# Altium PCB SphinxEVK_ExtIO.PcbDoc
Units mm, origin at the board's own origin, x right, y up, seen from the top; angles counter-clockwise.
Board outline 68.58 x 24 mm, 2 copper layers (Top Layer, Bottom Layer); 8 components, 49 nets, 416 pads, 0 vias.
Unrouted connection lines stored in the file: 145.
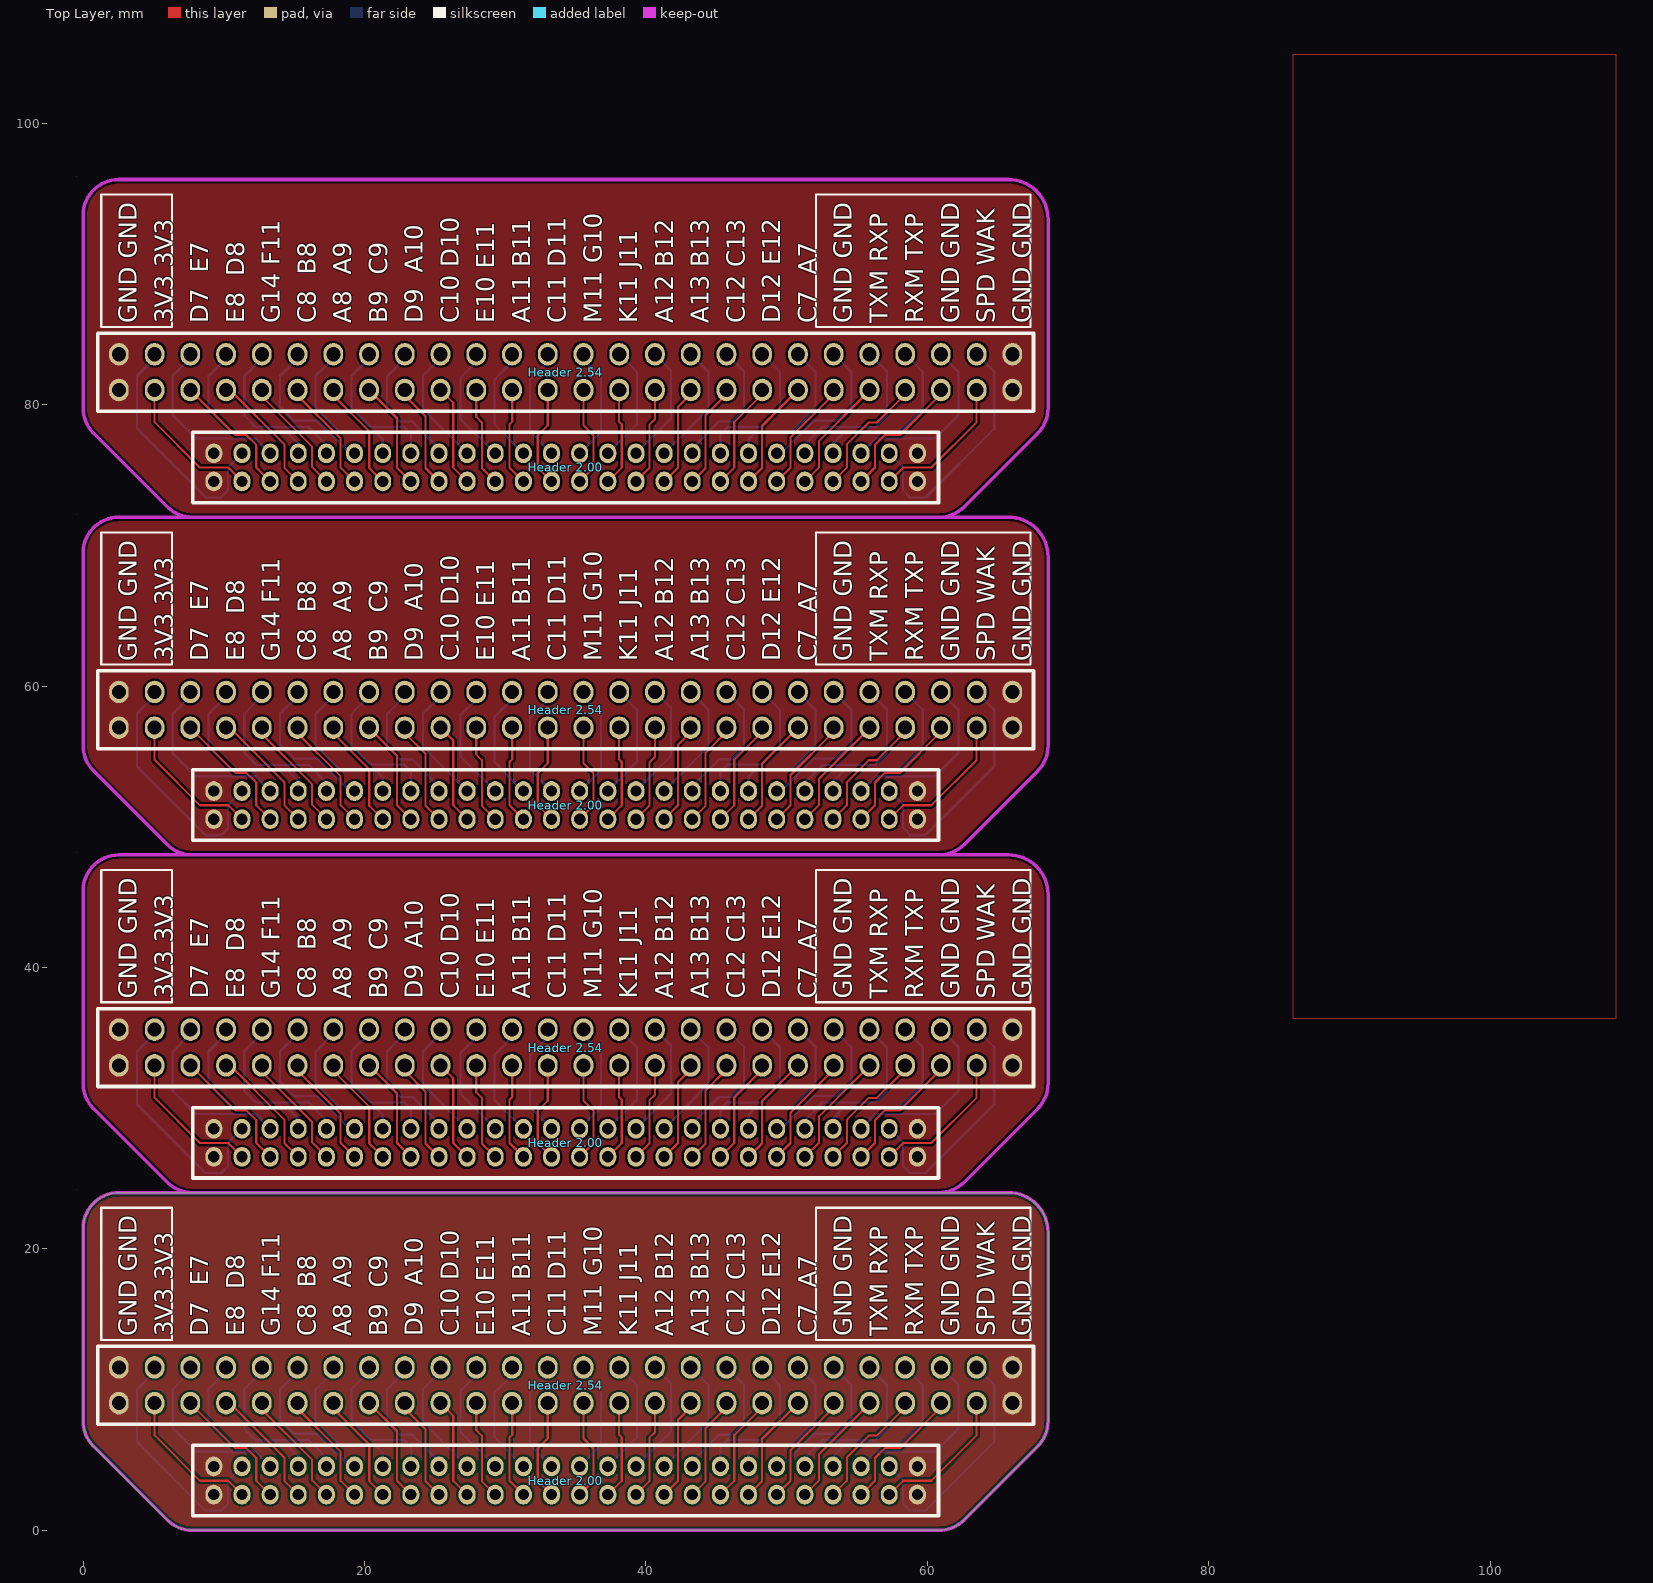
[diagram p0: Top Layer view]
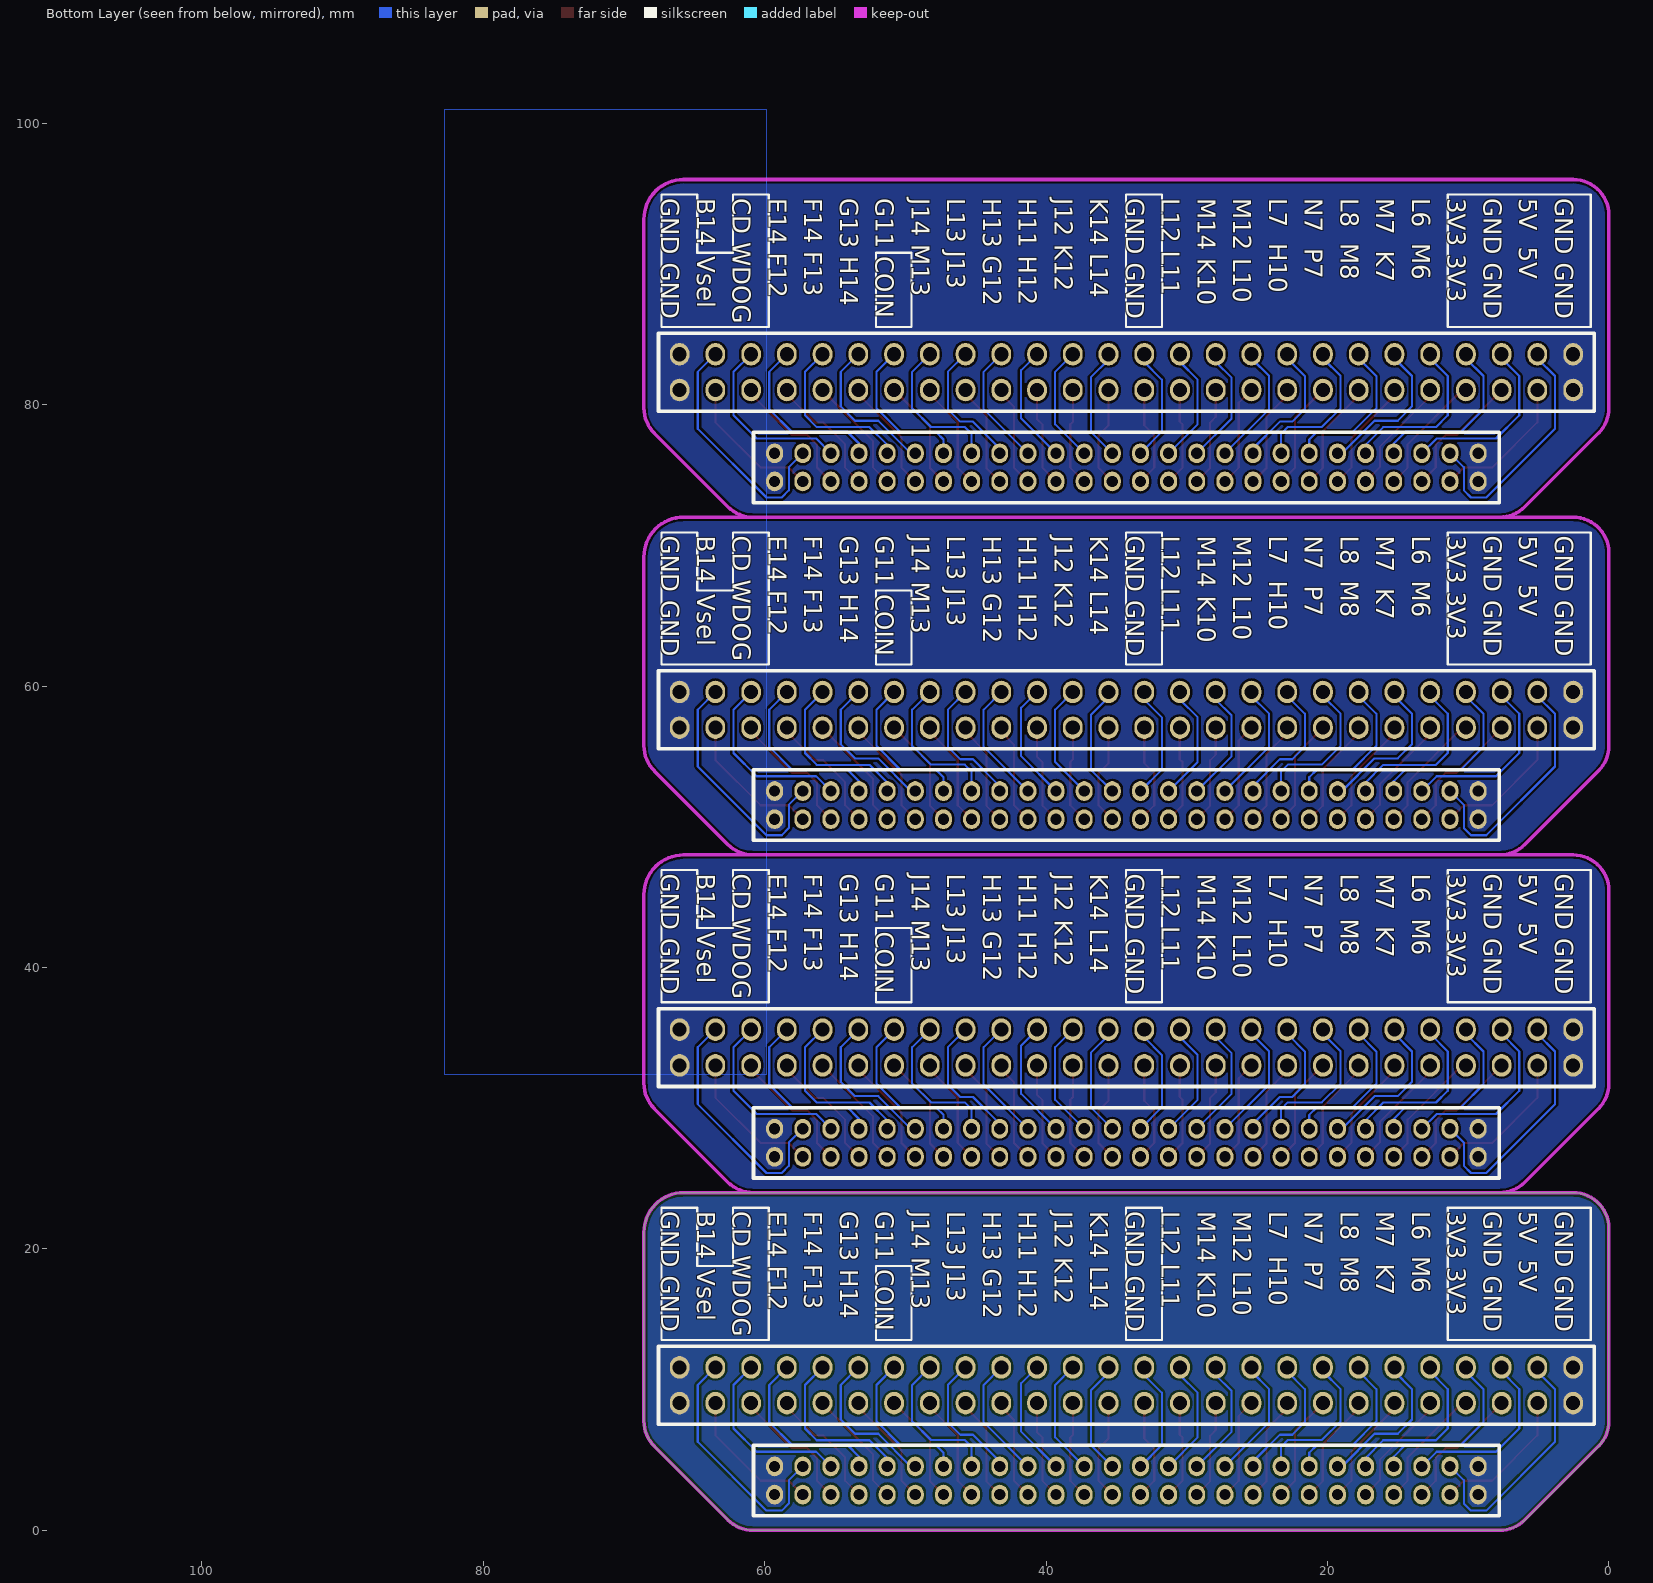
[diagram p1: Bottom Layer view, seen from below]

## Layer stack, top to bottom
Top Solder: solder mask 0.0102, Solder Resist, Dk 3.5
Top Layer: signal copper 0.0356
Dielectric 1: dielectric 0.32, FR-4, Dk 4.8
Bottom Layer: signal copper 0.0356
Bottom Solder: solder mask 0.0102, Solder Resist, Dk 3.5

## Board outline
0.745,5.971 cw(c2.541,7.767) 0.001,7.767 0,7.767 0,21.46 cw(c2.54,21.46) 2.54,24 65.763,24 cw(c65.763,21.183) 68.58,21.183 68.58,7.767 68.579,7.767 cw(c66.039,7.767) 67.835,5.971 62.61,0.745 62.61,0.744 cw(c60.814,2.54) 60.814,0 7.766,0 7.766,0.002 cw(c7.766,2.542) 5.97,0.745

## Design rules (kind name [scope] priority, off if disabled: settings)
Clearance [All] p1: gap=0.152 ignorepadtopadclearanceinfootprint=FALSE
ComponentClearance [All] p1: gap=0 collisioncheckmode=3 verticalgap=0 showdistances=FALSE
PolygonConnect [All] p1: connectstyle=Direct reliefconductorwidth=0.254 reliefentries=4 polygonreliefangle="90 Angle" airgapwidth=0.254
RoutingVias [All] p1: holewidth=0.711 width=1.27 viastyle="Through Hole" minholewidth=0.711 minwidth=1.27 maxholewidth=0.711 maxwidth=1.27
SilkToSilkClearance [All] p1: silktosilkclearance=0.152
SolderMaskExpansion [All] p1: expansion=0.102
Width [All] p1: maxlimit=0.508 minlimit=0.127 preferedwidth=0.152
28 further rules are at their usual default settings.

## Classes and differential pairs
component class SphinxEVK_ExtIO: "Header 2.00" "Header 2.54"

## Components (designator, comment, footprint, x,y, rotation, side; value= is the part's Value field where it differs from the comment)
"Header 2.00" "Header 26X2" "Header 26X2 2mm" 34.292,75.564 r0 top locked
"Header 2.00" "Header 26X2" "Header 26X2 2mm" 34.292,51.564 r0 top locked
"Header 2.00" "Header 26X2" "Header 26X2 2mm" 34.292,27.564 r0 top locked
"Header 2.00" "Header 26X2" "Header 26X2 2mm" 34.292,3.564 r0 top locked
"Header 2.54" "Header 26X2" "Header 26X2 2.54mm" 34.291,82.292 r0 top
"Header 2.54" "Header 26X2" "Header 26X2 2.54mm" 34.291,58.292 r0 top
"Header 2.54" "Header 26X2" "Header 26X2 2.54mm" 34.291,34.292 r0 top
"Header 2.54" "Header 26X2" "Header 26X2 2.54mm" 34.291,10.292 r0 top

## Footprints (in the part's own frame and the unit in brackets; to place one, negate y for a bottom-side part, rotate by r counter-clockwise, add the part's x,y. Pads: shape width x height; smd on the part's side, far side on the other; paste and mask are expansions set on the pad)
"Header 26X2 2.54mm" [mm]
  oval 1.4x1.6 hole 1: 1(-31.751,-1.25) 2(-31.751,1.29) 3(-29.211,-1.25) 4(-29.211,1.29) 5(-26.671,-1.25) 6(-26.671,1.29) 7(-24.131,-1.25) 8(-24.131,1.29) 9(-21.591,-1.25) 10(-21.591,1.29) 11(-19.051,-1.25) 12(-19.051,1.29) 13(-16.511,-1.25) 14(-16.511,1.29) 15(-13.971,-1.25) 16(-13.971,1.29) 17(-11.431,-1.25) 18(-11.431,1.29) 19(-8.891,-1.25) 20(-8.891,1.29) 21(-6.351,-1.25) 22(-6.351,1.29) 23(-3.811,-1.25) 24(-3.811,1.29) 25(-1.271,-1.25) 26(-1.271,1.29) 27(1.269,-1.25) 28(1.269,1.29) 29(3.809,-1.25) 30(3.809,1.29) 31(6.349,-1.25) 32(6.349,1.29) 33(8.889,-1.25) 34(8.889,1.29) 35(11.429,-1.25) 36(11.429,1.29) 37(13.969,-1.25) 38(13.969,1.29) 39(16.509,-1.25) 40(16.509,1.29) 41(19.049,-1.25) 42(19.049,1.29) 43(21.589,-1.25) 44(21.589,1.29) 45(24.129,-1.25) 46(24.129,1.29) 47(26.669,-1.25) 48(26.669,1.29) 49(29.209,-1.25) 50(29.209,1.29) 51(31.749,-1.25) 52(31.749,1.29)
  silkscreen extent -33.25,-2.75 33.25,2.79, body extent -32.97,-2.54 32.98,2.54, height 8
"Header 26X2 2mm" [mm]
  oval 1.2x1.4 hole 0.8: 1(-25.002,-1.023) 2(-25.002,0.977) 3(-23.002,-1.023) 4(-23.002,0.977) 5(-21.002,-1.023) 6(-21.002,0.977) 7(-19.002,-1.023) 8(-19.002,0.977) 9(-17.002,-1.023) 10(-17.002,0.977) 11(-15.002,-1.023) 12(-15.002,0.977) 13(-13.002,-1.023) 14(-13.002,0.977) 15(-11.002,-1.023) 16(-11.002,0.977) 17(-9.002,-1.023) 18(-9.002,0.977) 19(-7.002,-1.023) 20(-7.002,0.977) 21(-5.002,-1.023) 22(-5.002,0.977) 23(-3.002,-1.023) 24(-3.002,0.977) 25(-1.002,-1.023) 26(-1.002,0.977) 27(0.998,-1.023) 28(0.998,0.977) 29(2.998,-1.023) 30(2.998,0.977) 31(4.998,-1.023) 32(4.998,0.977) 33(6.998,-1.023) 34(6.998,0.977) 35(8.998,-1.023) 36(8.998,0.977) 37(10.998,-1.023) 38(10.998,0.977) 39(12.998,-1.023) 40(12.998,0.977) 41(14.998,-1.023) 42(14.998,0.977) 43(16.998,-1.023) 44(16.998,0.977) 45(18.998,-1.023) 46(18.998,0.977) 47(20.998,-1.023) 48(20.998,0.977) 49(22.998,-1.023) 50(22.998,0.977) 51(24.998,-1.023) 52(24.998,0.977)
  silkscreen extent -26.5,-2.52 26.5,2.48, body extent -26.01,-2.17 25.99,4.3, height 6.35

## Nets (pads, with @x,y where several pads share a name; then routed paths per layer and width w, separated by ;. In a path a pad name is that pad's centre, name@x,y a point inside that pad or via, vN(x,y) a via of type N, cw(c..) or ccw(c..) an arc to the next point about the centre after c; other vN are vias at no path point)
A3: "Header 2.00.3" "Header 2.54.3" | length 41
  Top Layer w0.152: 5.08,9.042 5.08,6.749 8.3,3.529 10.303,3.529 11.29,2.542 ; 5.08,33.042 5.08,30.749 8.3,27.529 10.303,27.529 11.29,26.542 ; 5.08,57.042 5.08,54.749 8.3,51.529 10.303,51.529 11.29,50.542 ; 5.08,81.042 5.08,78.749 8.3,75.529 10.303,75.529 11.29,74.542
A4: "Header 2.00.4" "Header 2.54.4" | length 70.3
  Bottom Layer w0.152: 5.08,11.582 5.08,11.286 3.826,10.032 3.826,6.288 8.715,1.399 9.795,1.399 10.306,1.91 10.306,3.558 11.29,4.542 ; 5.08,35.582 5.08,35.286 3.826,34.032 3.826,30.288 8.715,25.399 9.795,25.399 10.306,25.91 10.306,27.558 11.29,28.542 ; 5.08,59.582 5.08,59.286 3.826,58.032 3.826,54.288 8.715,49.399 9.795,49.399 10.306,49.91 10.306,51.558 11.29,52.542 ; 5.08,83.582 5.08,83.286 3.826,82.032 3.826,78.288 8.715,73.399 9.795,73.399 10.306,73.91 10.306,75.558 11.29,76.542
A5: "Header 2.00.5" "Header 2.54.5" | length 37.2
  Top Layer w0.152: 7.62,9.042 10.818,5.844 11.604,5.844 12.303,5.145 12.303,3.529 13.29,2.542 ; 7.62,33.042 10.818,29.844 11.604,29.844 12.303,29.145 12.303,27.529 13.29,26.542 ; 7.62,57.042 10.818,53.844 11.604,53.844 12.303,53.145 12.303,51.529 13.29,50.542 ; 7.62,81.042 10.818,77.844 11.604,77.844 12.303,77.145 12.303,75.529 13.29,74.542
A6: "Header 2.00.6" "Header 2.54.6" | length 51.6
  Bottom Layer w0.152: 7.62,11.582 7.62,11.286 6.366,10.032 6.366,7.241 8.017,5.59 12.242,5.59 13.29,4.542 ; 7.62,35.582 7.62,35.286 6.366,34.032 6.366,31.241 8.017,29.59 12.242,29.59 13.29,28.542 ; 7.62,59.582 7.62,59.286 6.366,58.032 6.366,55.241 8.017,53.59 12.242,53.59 13.29,52.542 ; 7.62,83.582 7.62,83.286 6.366,82.032 6.366,79.241 8.017,77.59 12.242,77.59 13.29,76.542
A7: "Header 2.00.7" "Header 2.54.7" | length 35.2
  Top Layer w0.152: 10.16,9.042 10.438,9.042 14.303,5.177 14.303,3.528 15.29,2.542 ; 10.16,33.042 10.438,33.042 14.303,29.177 14.303,27.528 15.29,26.542 ; 10.16,57.042 10.438,57.042 14.303,53.177 14.303,51.528 15.29,50.542 ; 10.16,81.042 10.438,81.042 14.303,77.177 14.303,75.528 15.29,74.542
A8: "Header 2.00.8" "Header 2.54.8" | length 50
  Bottom Layer w0.152: 10.16,11.582 10.16,11.286 8.906,10.032 8.906,7.685 10.493,6.098 14.43,6.098 15.29,5.238 15.29,4.542 ; 10.16,35.582 10.16,35.286 8.906,34.032 8.906,31.685 10.493,30.098 14.43,30.098 15.29,29.238 15.29,28.542 ; 10.16,59.582 10.16,59.286 8.906,58.032 8.906,55.685 10.493,54.098 14.43,54.098 15.29,53.238 15.29,52.542 ; 10.16,83.582 10.16,83.286 8.906,82.032 8.906,79.685 10.493,78.098 14.43,78.098 15.29,77.238 15.29,76.542
A9: "Header 2.00.9" "Header 2.54.9" | length 33.6
  Top Layer w0.152: 12.7,9.042 12.7,8.59 16.272,5.018 16.272,3.56 17.29,2.542 ; 12.7,33.042 12.7,32.59 16.272,29.018 16.272,27.56 17.29,26.542 ; 12.7,57.042 12.7,56.59 16.272,53.018 16.272,51.56 17.29,50.542 ; 12.7,81.042 12.7,80.59 16.272,77.018 16.272,75.56 17.29,74.542
A10: "Header 2.00.10" "Header 2.54.10" | length 48.7
  Bottom Layer w0.152: 12.7,11.582 12.7,11.286 11.446,10.032 11.446,7.241 12.284,6.402 16.031,6.402 17.29,5.143 17.29,4.542 ; 12.7,35.582 12.7,35.286 11.446,34.032 11.446,31.241 12.284,30.402 16.031,30.402 17.29,29.143 17.29,28.542 ; 12.7,59.582 12.7,59.286 11.446,58.032 11.446,55.241 12.284,54.402 16.031,54.402 17.29,53.143 17.29,52.542 ; 12.7,83.582 12.7,83.286 11.446,82.032 11.446,79.241 12.284,78.402 16.031,78.402 17.29,77.143 17.29,76.542
A11: "Header 2.00.11" "Header 2.54.11" | length 32.7
  Top Layer w0.152: 15.24,9.042 15.24,8.654 18.304,5.59 18.304,3.528 19.29,2.542 ; 15.24,33.042 15.24,32.654 18.304,29.59 18.304,27.528 19.29,26.542 ; 15.24,57.042 15.24,56.654 18.304,53.59 18.304,51.528 19.29,50.542 ; 15.24,81.042 15.24,80.654 18.304,77.59 18.304,75.528 19.29,74.542
A12: "Header 2.00.12" "Header 2.54.12" | length 43.6
  Bottom Layer w0.152: 15.24,11.582 15.24,11.286 13.986,10.032 13.986,7.876 15.002,6.86 16.653,6.86 18.971,4.542 19.29,4.542 ; 15.24,35.582 15.24,35.286 13.986,34.032 13.986,31.876 15.002,30.86 16.653,30.86 18.971,28.542 19.29,28.542 ; 15.24,59.582 15.24,59.286 13.986,58.032 13.986,55.876 15.002,54.86 16.653,54.86 18.971,52.542 19.29,52.542 ; 15.24,83.582 15.24,83.286 13.986,82.032 13.986,79.876 15.002,78.86 16.653,78.86 18.971,76.542 19.29,76.542
A13: "Header 2.00.13" "Header 2.54.13" | length 31.8
  Top Layer w0.152: 17.78,9.042 17.78,8.657 20.336,6.101 20.336,3.496 21.29,2.542 ; 17.78,33.042 17.78,32.657 20.336,30.101 20.336,27.496 21.29,26.542 ; 17.78,57.042 17.78,56.657 20.336,54.101 20.336,51.496 21.29,50.542 ; 17.78,81.042 17.78,80.657 20.336,78.101 20.336,75.496 21.29,74.542
A14: "Header 2.00.14" "Header 2.54.14" | length 44.1
  Bottom Layer w0.152: 17.78,11.582 17.78,11.286 16.526,10.032 16.526,7.749 18.24,6.034 20.78,6.034 21.29,5.525 21.29,4.542 ; 17.78,35.582 17.78,35.286 16.526,34.032 16.526,31.749 18.24,30.034 20.78,30.034 21.29,29.525 21.29,28.542 ; 17.78,59.582 17.78,59.286 16.526,58.032 16.526,55.749 18.24,54.034 20.78,54.034 21.29,53.525 21.29,52.542 ; 17.78,83.582 17.78,83.286 16.526,82.032 16.526,79.749 18.24,78.034 20.78,78.034 21.29,77.525 21.29,76.542
A15: "Header 2.00.15" "Header 2.54.15" | length 30.9
  Top Layer w0.152: 20.32,9.042 22.304,7.057 22.304,3.527 23.29,2.542 ; 20.32,33.042 22.304,31.057 22.304,27.527 23.29,26.542 ; 20.32,57.042 22.304,55.057 22.304,51.527 23.29,50.542 ; 20.32,81.042 22.304,79.057 22.304,75.527 23.29,74.542
A16: "Header 2.00.16" "Header 2.54.16" | length 42.9
  Bottom Layer w0.152: 20.32,11.582 20.32,11.286 19.066,10.032 19.066,7.749 20.399,6.415 22.812,6.415 23.29,5.938 23.29,4.542 ; 20.32,35.582 20.32,35.286 19.066,34.032 19.066,31.749 20.399,30.415 22.812,30.415 23.29,29.938 23.29,28.542 ; 20.32,59.582 20.32,59.286 19.066,58.032 19.066,55.749 20.399,54.415 22.812,54.415 23.29,53.938 23.29,52.542 ; 20.32,83.582 20.32,83.286 19.066,82.032 19.066,79.749 20.399,78.415 22.812,78.415 23.29,77.938 23.29,76.542
A17: "Header 2.00.17" "Header 2.54.17" | length 30
  Top Layer w0.152: 22.86,9.042 22.86,8.657 24.336,7.18 24.336,3.495 25.29,2.542 ; 22.86,33.042 22.86,32.657 24.336,31.18 24.336,27.495 25.29,26.542 ; 22.86,57.042 22.86,56.657 24.336,55.18 24.336,51.495 25.29,50.542 ; 22.86,81.042 22.86,80.657 24.336,79.18 24.336,75.495 25.29,74.542
A18: "Header 2.00.18" "Header 2.54.18" | length 38.4
  Bottom Layer w0.152: 22.86,11.582 22.86,11.286 21.606,10.032 21.606,7.685 22.495,6.796 23.384,6.796 25.29,4.89 25.29,4.542 ; 22.86,35.582 22.86,35.286 21.606,34.032 21.606,31.685 22.495,30.796 23.384,30.796 25.29,28.89 25.29,28.542 ; 22.86,59.582 22.86,59.286 21.606,58.032 21.606,55.685 22.495,54.796 23.384,54.796 25.29,52.89 25.29,52.542 ; 22.86,83.582 22.86,83.286 21.606,82.032 21.606,79.685 22.495,78.796 23.384,78.796 25.29,76.89 25.29,76.542
A19: "Header 2.00.19" "Header 2.54.19" | length 29.1
  Top Layer w0.152: 25.4,9.042 26.305,8.137 26.305,3.527 27.29,2.542 ; 25.4,33.042 26.305,32.137 26.305,27.527 27.29,26.542 ; 25.4,57.042 26.305,56.137 26.305,51.527 27.29,50.542 ; 25.4,81.042 26.305,80.137 26.305,75.527 27.29,74.542
A20: "Header 2.00.20" "Header 2.54.20" | length 35.4
  Bottom Layer w0.152: 25.4,11.582 25.4,11.286 24.146,10.032 24.146,7.686 27.29,4.542 ; 25.4,35.582 25.4,35.286 24.146,34.032 24.146,31.686 27.29,28.542 ; 25.4,59.582 25.4,59.286 24.146,58.032 24.146,55.686 27.29,52.542 ; 25.4,83.582 25.4,83.286 24.146,82.032 24.146,79.686 27.29,76.542
A21: "Header 2.00.21" "Header 2.54.21" | length 28.2
  Top Layer w0.152: 27.94,9.042 27.94,7.13 28.337,6.733 28.337,3.495 29.29,2.542 ; 27.94,33.042 27.94,31.13 28.337,30.733 28.337,27.495 29.29,26.542 ; 27.94,57.042 27.94,55.13 28.337,54.733 28.337,51.495 29.29,50.542 ; 27.94,81.042 27.94,79.13 28.337,78.733 28.337,75.495 29.29,74.542
A22: "Header 2.00.22" "Header 2.54.22" | length 34.1
  Bottom Layer w0.152: 27.94,11.582 27.94,11.032 26.813,9.905 26.813,7.019 29.29,4.542 ; 27.94,35.582 27.94,35.032 26.813,33.905 26.813,31.019 29.29,28.542 ; 27.94,59.582 27.94,59.032 26.813,57.905 26.813,55.019 29.29,52.542 ; 27.94,83.582 27.94,83.032 26.813,81.905 26.813,79.019 29.29,76.542
A23: "Header 2.00.23" "Header 2.54.23" | length 28
  Top Layer w0.152: 30.48,9.042 30.496,9.026 30.496,6.796 30.305,6.606 30.305,3.526 31.29,2.542 ; 30.48,33.042 30.496,33.026 30.496,30.796 30.305,30.606 30.305,27.526 31.29,26.542 ; 30.48,57.042 30.496,57.026 30.496,54.796 30.305,54.606 30.305,51.526 31.29,50.542 ; 30.48,81.042 30.496,81.026 30.496,78.796 30.305,78.606 30.305,75.526 31.29,74.542
A24: "Header 2.00.24" "Header 2.54.24" | length 33.7
  Bottom Layer w0.152: 30.48,11.582 30.48,11.032 29.226,9.778 29.226,6.606 31.29,4.542 ; 30.48,35.582 30.48,35.032 29.226,33.778 29.226,30.606 31.29,28.542 ; 30.48,59.582 30.48,59.032 29.226,57.778 29.226,54.606 31.29,52.542 ; 30.48,83.582 30.48,83.032 29.226,81.778 29.226,78.606 31.29,76.542
A25: "Header 2.00.25" "Header 2.54.25" | length 28.8
  Top Layer w0.152: 33.02,9.042 33.02,6.526 32.305,5.812 32.305,3.526 33.29,2.542 ; 33.02,33.042 33.02,30.526 32.305,29.812 32.305,27.526 33.29,26.542 ; 33.02,57.042 33.02,54.526 32.305,53.812 32.305,51.526 33.29,50.542 ; 33.02,81.042 33.02,78.526 32.305,77.812 32.305,75.526 33.29,74.542
A26: "Header 2.00.26" "Header 2.54.26" | length 32.8
  Bottom Layer w0.152: 33.02,11.582 33.02,11.032 31.766,9.778 31.766,6.066 33.29,4.542 ; 33.02,35.582 33.02,35.032 31.766,33.778 31.766,30.066 33.29,28.542 ; 33.02,59.582 33.02,59.032 31.766,57.778 31.766,54.066 33.29,52.542 ; 33.02,83.582 33.02,83.032 31.766,81.778 31.766,78.066 33.29,76.542
A27: "Header 2.00.27" "Header 2.54.27" | length 28.8
  Top Layer w0.152: 35.29,2.542 36.274,3.526 36.274,5.812 35.56,6.526 35.56,9.042 ; 35.29,26.542 36.274,27.526 36.274,29.812 35.56,30.526 35.56,33.042 ; 35.29,50.542 36.274,51.526 36.274,53.812 35.56,54.526 35.56,57.042 ; 35.29,74.542 36.274,75.526 36.274,77.812 35.56,78.526 35.56,81.042
A28: "Header 2.00.28" "Header 2.54.28" | length 32.8
  Bottom Layer w0.152: 35.29,4.542 36.814,6.066 36.814,9.943 35.56,11.197 35.56,11.582 ; 35.29,28.542 36.814,30.066 36.814,33.943 35.56,35.197 35.56,35.582 ; 35.29,52.542 36.814,54.066 36.814,57.943 35.56,59.197 35.56,59.582 ; 35.29,76.542 36.814,78.066 36.814,81.943 35.56,83.197 35.56,83.582
A29: "Header 2.00.29" "Header 2.54.29" | length 28
  Top Layer w0.152: 37.29,2.542 38.274,3.526 38.274,6.606 38.084,6.796 38.084,9.026 38.1,9.042 ; 37.29,26.542 38.274,27.526 38.274,30.606 38.084,30.796 38.084,33.026 38.1,33.042 ; 37.29,50.542 38.274,51.526 38.274,54.606 38.084,54.796 38.084,57.026 38.1,57.042 ; 37.29,74.542 38.274,75.526 38.274,78.606 38.084,78.796 38.084,81.026 38.1,81.042
A30: "Header 2.00.30" "Header 2.54.30" | length 33.7
  Bottom Layer w0.152: 37.29,4.542 39.354,6.606 39.354,10.328 38.1,11.582 ; 37.29,28.542 39.354,30.606 39.354,34.328 38.1,35.582 ; 37.29,52.542 39.354,54.606 39.354,58.328 38.1,59.582 ; 37.29,76.542 39.354,78.606 39.354,82.328 38.1,83.582
A31: "Header 2.00.31" "Header 2.54.31" | length 28.2
  Top Layer w0.152: 39.29,2.542 40.243,3.495 40.243,6.571 40.64,6.968 40.64,9.042 ; 39.29,26.542 40.243,27.495 40.243,30.571 40.64,30.968 40.64,33.042 ; 39.29,50.542 40.243,51.495 40.243,54.571 40.64,54.968 40.64,57.042 ; 39.29,74.542 40.243,75.495 40.243,78.571 40.64,78.968 40.64,81.042
A32: "Header 2.00.32" "Header 2.54.32" | length 34.1
  Bottom Layer w0.152: 39.29,4.542 41.767,7.019 41.767,10.455 40.64,11.582 ; 39.29,28.542 41.767,31.019 41.767,34.455 40.64,35.582 ; 39.29,52.542 41.767,55.019 41.767,58.455 40.64,59.582 ; 39.29,76.542 41.767,79.019 41.767,82.455 40.64,83.582
A33: "Header 2.00.33" "Header 2.54.33" | length 29.1
  Top Layer w0.152: 41.29,2.542 42.275,3.527 42.275,7.841 43.18,8.746 43.18,9.042 ; 41.29,26.542 42.275,27.527 42.275,31.841 43.18,32.746 43.18,33.042 ; 41.29,50.542 42.275,51.527 42.275,55.841 43.18,56.746 43.18,57.042 ; 41.29,74.542 42.275,75.527 42.275,79.841 43.18,80.746 43.18,81.042
A34: "Header 2.00.34" "Header 2.54.34" | length 35.4
  Bottom Layer w0.152: 41.29,4.542 44.434,7.686 44.434,10.328 43.18,11.582 ; 41.29,28.542 44.434,31.686 44.434,34.328 43.18,35.582 ; 41.29,52.542 44.434,55.686 44.434,58.328 43.18,59.582 ; 41.29,76.542 44.434,79.686 44.434,82.328 43.18,83.582
A35: "Header 2.00.35" "Header 2.54.35" | length 30
  Top Layer w0.152: 43.29,2.542 44.243,3.495 44.243,7.269 45.72,8.746 45.72,9.042 ; 43.29,26.542 44.243,27.495 44.243,31.269 45.72,32.746 45.72,33.042 ; 43.29,50.542 44.243,51.495 44.243,55.269 45.72,56.746 45.72,57.042 ; 43.29,74.542 44.243,75.495 44.243,79.269 45.72,80.746 45.72,81.042
A36: "Header 2.00.36" "Header 2.54.36" | length 38.4
  Bottom Layer w0.152: 43.29,4.542 43.29,4.89 45.196,6.796 46.085,6.796 46.974,7.685 46.974,10.328 45.72,11.582 ; 43.29,28.542 43.29,28.89 45.196,30.796 46.085,30.796 46.974,31.685 46.974,34.328 45.72,35.582 ; 43.29,52.542 43.29,52.89 45.196,54.796 46.085,54.796 46.974,55.685 46.974,58.328 45.72,59.582 ; 43.29,76.542 43.29,76.89 45.196,78.796 46.085,78.796 46.974,79.685 46.974,82.328 45.72,83.582
A37: "Header 2.00.37" "Header 2.54.37" | length 30.9
  Top Layer w0.152: 45.29,2.542 46.275,3.527 46.275,6.761 48.26,8.746 48.26,9.042 ; 45.29,26.542 46.275,27.527 46.275,30.761 48.26,32.746 48.26,33.042 ; 45.29,50.542 46.275,51.527 46.275,54.761 48.26,56.746 48.26,57.042 ; 45.29,74.542 46.275,75.527 46.275,78.761 48.26,80.746 48.26,81.042
A38: "Header 2.00.38" "Header 2.54.38" | length 42.9
  Bottom Layer w0.152: 45.29,4.542 45.29,5.938 45.767,6.415 48.18,6.415 49.514,7.749 49.514,10.328 48.26,11.582 ; 45.29,28.542 45.29,29.938 45.767,30.415 48.18,30.415 49.514,31.749 49.514,34.328 48.26,35.582 ; 45.29,52.542 45.29,53.938 45.767,54.415 48.18,54.415 49.514,55.749 49.514,58.328 48.26,59.582 ; 45.29,76.542 45.29,77.938 45.767,78.415 48.18,78.415 49.514,79.749 49.514,82.328 48.26,83.582
A39: "Header 2.00.39" "Header 2.54.39" | length 31.8
  Top Layer w0.152: 47.29,2.542 48.244,3.496 48.244,6.486 50.8,9.042 ; 47.29,26.542 48.244,27.496 48.244,30.486 50.8,33.042 ; 47.29,50.542 48.244,51.496 48.244,54.486 50.8,57.042 ; 47.29,74.542 48.244,75.496 48.244,78.486 50.8,81.042
A40: "Header 2.00.40" "Header 2.54.40" | length 44.1
  Bottom Layer w0.152: 47.29,4.542 47.29,5.525 47.799,6.034 50.339,6.034 52.054,7.749 52.054,10.328 50.8,11.582 ; 47.29,28.542 47.29,29.525 47.799,30.034 50.339,30.034 52.054,31.749 52.054,34.328 50.8,35.582 ; 47.29,52.542 47.29,53.525 47.799,54.034 50.339,54.034 52.054,55.749 52.054,58.328 50.8,59.582 ; 47.29,76.542 47.29,77.525 47.799,78.034 50.339,78.034 52.054,79.749 52.054,82.328 50.8,83.582
A41: "Header 2.00.41" "Header 2.54.41" | length 32.7
  Top Layer w0.152: 49.29,2.542 50.276,3.528 50.276,5.682 53.34,8.746 53.34,9.042 ; 49.29,26.542 50.276,27.528 50.276,29.682 53.34,32.746 53.34,33.042 ; 49.29,50.542 50.276,51.528 50.276,53.682 53.34,56.746 53.34,57.042 ; 49.29,74.542 50.276,75.528 50.276,77.682 53.34,80.746 53.34,81.042
A42: "Header 2.00.42" "Header 2.54.42" | length 43.6
  Bottom Layer w0.152: 49.29,4.542 49.609,4.542 51.927,6.86 53.578,6.86 54.594,7.876 54.594,10.328 53.34,11.582 ; 49.29,28.542 49.609,28.542 51.927,30.86 53.578,30.86 54.594,31.876 54.594,34.328 53.34,35.582 ; 49.29,52.542 49.609,52.542 51.927,54.86 53.578,54.86 54.594,55.876 54.594,58.328 53.34,59.582 ; 49.29,76.542 49.609,76.542 51.927,78.86 53.578,78.86 54.594,79.876 54.594,82.328 53.34,83.582
A43: "Header 2.00.43" "Header 2.54.43" | length 33.5
  Top Layer w0.152: 51.29,2.542 52.308,3.56 52.308,5.428 55.708,8.828 55.962,8.828 ; 51.29,26.542 52.308,27.56 52.308,29.428 55.708,32.828 55.962,32.828 ; 51.29,50.542 52.308,51.56 52.308,53.428 55.708,56.828 55.962,56.828 ; 51.29,74.542 52.308,75.56 52.308,77.428 55.708,80.828 55.962,80.828
A44: "Header 2.00.44" "Header 2.54.44" | length 48.7
  Bottom Layer w0.152: 51.29,4.542 51.29,5.143 52.549,6.402 56.296,6.402 57.134,7.241 57.134,10.328 55.88,11.582 ; 51.29,28.542 51.29,29.143 52.549,30.402 56.296,30.402 57.134,31.241 57.134,34.328 55.88,35.582 ; 51.29,52.542 51.29,53.143 52.549,54.402 56.296,54.402 57.134,55.241 57.134,58.328 55.88,59.582 ; 51.29,76.542 51.29,77.143 52.549,78.402 56.296,78.402 57.134,79.241 57.134,82.328 55.88,83.582
A45: "Header 2.00.45" "Header 2.54.45" | length 35.8
  Top Layer w0.152: 53.29,2.542 54.276,3.528 54.276,5.177 55.832,6.733 56.407,6.733 58.42,8.746 58.42,9.042 ; 53.29,26.542 54.276,27.528 54.276,29.177 55.832,30.733 56.407,30.733 58.42,32.746 58.42,33.042 ; 53.29,50.542 54.276,51.528 54.276,53.177 55.832,54.733 56.407,54.733 58.42,56.746 58.42,57.042 ; 53.29,74.542 54.276,75.528 54.276,77.177 55.832,78.733 56.407,78.733 58.42,80.746 58.42,81.042
A46: "Header 2.00.46" "Header 2.54.46" | length 50
  Bottom Layer w0.152: 53.29,4.542 53.29,5.238 54.149,6.098 58.086,6.098 59.674,7.685 59.674,10.328 58.42,11.582 ; 53.29,28.542 53.29,29.238 54.149,30.098 58.086,30.098 59.674,31.685 59.674,34.328 58.42,35.582 ; 53.29,52.542 53.29,53.238 54.149,54.098 58.086,54.098 59.674,55.685 59.674,58.328 58.42,59.582 ; 53.29,76.542 53.29,77.238 54.149,78.098 58.086,78.098 59.674,79.685 59.674,82.328 58.42,83.582
A47: "Header 2.00.47" "Header 2.54.47" | length 37.9
  Top Layer w0.152: 55.29,2.542 56.277,3.529 56.277,5.145 56.975,5.844 58.058,5.844 60.96,8.746 60.96,9.042 ; 55.29,26.542 56.277,27.529 56.277,29.145 56.975,29.844 58.058,29.844 60.96,32.746 60.96,33.042 ; 55.29,50.542 56.277,51.529 56.277,53.145 56.975,53.844 58.058,53.844 60.96,56.746 60.96,57.042 ; 55.29,74.542 56.277,75.529 56.277,77.145 56.975,77.844 58.058,77.844 60.96,80.746 60.96,81.042
A48: "Header 2.00.48" "Header 2.54.48" | length 51.6
  Bottom Layer w0.152: 55.29,4.542 56.338,5.59 60.563,5.59 62.214,7.241 62.214,10.328 60.96,11.582 ; 55.29,28.542 56.338,29.59 60.563,29.59 62.214,31.241 62.214,34.328 60.96,35.582 ; 55.29,52.542 56.338,53.59 60.563,53.59 62.214,55.241 62.214,58.328 60.96,59.582 ; 55.29,76.542 56.338,77.59 60.563,77.59 62.214,79.241 62.214,82.328 60.96,83.582
A49: "Header 2.00.49" "Header 2.54.49" | length 41
  Top Layer w0.152: 57.29,2.542 58.277,3.529 60.28,3.529 63.5,6.749 63.5,9.042 ; 57.29,26.542 58.277,27.529 60.28,27.529 63.5,30.749 63.5,33.042 ; 57.29,50.542 58.277,51.529 60.28,51.529 63.5,54.749 63.5,57.042 ; 57.29,74.542 58.277,75.529 60.28,75.529 63.5,78.749 63.5,81.042
A50: "Header 2.00.50" "Header 2.54.50" | length 70.3
  Bottom Layer w0.152: 57.29,4.542 58.274,3.558 58.274,1.91 58.785,1.399 59.864,1.399 64.754,6.288 64.754,10.328 63.5,11.582 ; 57.29,28.542 58.274,27.558 58.274,25.91 58.785,25.399 59.864,25.399 64.754,30.288 64.754,34.328 63.5,35.582 ; 57.29,52.542 58.274,51.558 58.274,49.91 58.785,49.399 59.864,49.399 64.754,54.288 64.754,58.328 63.5,59.582 ; 57.29,76.542 58.274,75.558 58.274,73.91 58.785,73.399 59.864,73.399 64.754,78.288 64.754,82.328 63.5,83.582
GND: "Header 2.00.1" "Header 2.00.2" "Header 2.00.51" "Header 2.00.52" "Header 2.54.1" "Header 2.54.2" "Header 2.54.51" "Header 2.54.52"

## Polygon pours and split planes (outlines as drawn)
GND on Bottom Layer "Bottom Layer-GND" (solid, pour order 32): 0.003,96 -0.017,78.814 6.796,72 61.949,72 68.662,78.714 68.663,96
GND on Bottom Layer "Bottom Layer-GND" (solid, pour order 28): 0.003,72 -0.017,54.814 6.796,48 61.949,48 68.662,54.714 68.663,72
GND on Bottom Layer "Bottom Layer-GND" (solid, pour order 24): 0.003,48 -0.017,30.814 6.796,24 61.949,24 68.662,30.714 68.663,48
GND on Bottom Layer "Bottom Layer-GND" (solid, pour order 20): 0.003,24 -0.017,6.814 6.796,0 61.949,0 68.662,6.714 68.663,24
GND on Bottom Layer "Bottom Layer-No Net" (solid, shelved, pour order 10): 82.759,100.957 82.759,32.396 59.836,32.396 59.836,100.957
GND on Top Layer "Top Layer-GND" (solid, pour order 34): 0.02,96 0,78.714 6.714,72 61.866,72 68.579,78.714 68.58,96
GND on Top Layer "Top Layer-GND" (solid, pour order 30): 0.02,72 0,54.714 6.714,48 61.866,48 68.579,54.714 68.58,72
GND on Top Layer "Top Layer-GND" (solid, pour order 26): 0.02,48 0,30.714 6.714,24 61.866,24 68.579,30.714 68.58,48
GND on Top Layer "Top Layer-GND" (solid, pour order 22): 0.02,24 0,6.714 6.714,0 61.866,0 68.579,6.714 68.58,24
no net on Top Layer "Top Layer-No Net" (solid, shelved, pour order 12): 108.921,104.904 108.921,36.343 85.998,36.343 85.998,104.904

## Keep-outs
Top Layer:
  region: -0.489,96.195
  region: -0.489,72.195
  region: -0.489,48.195
  region: -0.489,24.195
Keep-Out Layer:
  lines w0.254: 0,7.767 0,21.46 cw(c2.54,21.46) 2.54,24 65.763,24 cw(c65.763,21.183) 68.58,21.183 68.58,7.767 ; 0,31.767 0,45.46 cw(c2.54,45.46) 2.54,48 65.763,48 cw(c65.763,45.183) 68.58,45.183 68.58,31.767 ; 0,55.767 0,69.46 cw(c2.54,69.46) 2.54,72 65.763,72 cw(c65.763,69.183) 68.58,69.183 68.58,55.767 ; 0,79.767 0,93.46 cw(c2.54,93.46) 2.54,96 65.763,96 cw(c65.763,93.183) 68.58,93.183 68.58,79.767 ; 0.001,7.767 ccw(c2.541,7.767) 0.745,5.971 5.97,0.745 ccw(c7.766,2.542) 7.766,0.002 ; 0.001,31.767 ccw(c2.541,31.767) 0.745,29.971 5.97,24.745 ccw(c7.766,26.542) 7.766,24.002 ; 0.001,55.767 ccw(c2.541,55.767) 0.745,53.971 5.97,48.745 ccw(c7.766,50.542) 7.766,48.002 ; 0.001,79.767 ccw(c2.541,79.767) 0.745,77.971 5.97,72.745 ccw(c7.766,74.542) 7.766,72.002 ; 7.766,0 60.814,0 ccw(c60.814,2.54) 62.61,0.744 ; 7.766,24 60.814,24 ccw(c60.814,26.54) 62.61,24.744 ; 7.766,48 60.814,48 ccw(c60.814,50.54) 62.61,48.744 ; 7.766,72 60.814,72 ccw(c60.814,74.54) 62.61,72.744 ; 62.61,0.745 67.835,5.971 ccw(c66.039,7.767) 68.579,7.767 ; 62.61,24.745 67.835,29.971 ccw(c66.039,31.767) 68.579,31.767 ; 62.61,48.745 67.835,53.971 ccw(c66.039,55.767) 68.579,55.767 ; 62.61,72.745 67.835,77.971 ccw(c66.039,79.767) 68.579,79.767

## Silkscreen, mask and mechanical layers (free items; w line width, h text height)
Top Overlay:
  lines w0.152: 1.289,13.527 1.289,22.925 6.305,22.925 6.305,13.527 1.289,13.527 ; 1.289,37.527 6.305,37.527 6.305,46.925 1.289,46.925 1.289,37.527 ; 1.289,61.527 6.305,61.527 6.305,70.925 1.289,70.925 1.289,61.527 ; 1.289,85.527 6.305,85.527 6.305,94.925 1.289,94.925 1.289,85.527 ; 52.089,13.527 52.089,22.925 67.329,22.925 67.329,13.527 52.089,13.527 ; 52.089,37.527 67.329,37.527 67.329,46.925 52.089,46.925 52.089,37.527 ; 52.089,61.527 67.329,61.527 67.329,70.925 52.089,70.925 52.089,61.527 ; 52.089,85.527 67.329,85.527 67.329,94.925 52.089,94.925 52.089,85.527
  text "GND GND" at 3.829,85.781 h1.27 r90
  text "3V3 3V3" at 6.369,85.781 h1.27 r90
  text "D7  E7" at 8.909,85.781 h1.27 r90
  text "E8  D8" at 11.449,85.781 h1.27 r90
  text "G14 F11" at 13.989,85.781 h1.27 r90
  text "C8  B8" at 16.529,85.781 h1.27 r90
  text "A8  A9" at 19.069,85.781 h1.27 r90
  text "B9  C9" at 21.609,85.781 h1.27 r90
  text "D9  A10" at 24.149,85.781 h1.27 r90
  text "C10 D10" at 26.689,85.781 h1.27 r90
  text "E10 E11" at 29.229,85.781 h1.27 r90
  text "A11 B11" at 31.769,85.781 h1.27 r90
  text "C11 D11" at 34.309,85.781 h1.27 r90
  text "M11 G10" at 36.849,85.781 h1.27 r90
  text "K11 J11" at 39.389,85.781 h1.27 r90
  text "A12 B12" at 41.929,85.781 h1.27 r90
  text "A13 B13" at 44.469,85.781 h1.27 r90
  text "C12 C13" at 47.009,85.781 h1.27 r90
  text "D12 E12" at 49.549,85.781 h1.27 r90
  text "C7  A7" at 52.089,85.781 h1.27 r90
  text "GND GND" at 54.629,85.781 h1.27 r90
  text "TXM RXP" at 57.169,85.781 h1.27 r90
  text "RXM TXP" at 59.709,85.781 h1.27 r90
  text "GND GND" at 62.249,85.781 h1.27 r90
  text "SPD WAK" at 64.789,85.781 h1.27 r90
  text "GND GND" at 67.329,85.781 h1.27 r90
  text "GND GND" at 3.829,61.781 h1.27 r90
  text "3V3 3V3" at 6.369,61.781 h1.27 r90
  text "D7  E7" at 8.909,61.781 h1.27 r90
  text "E8  D8" at 11.449,61.781 h1.27 r90
  text "G14 F11" at 13.989,61.781 h1.27 r90
  text "C8  B8" at 16.529,61.781 h1.27 r90
  text "A8  A9" at 19.069,61.781 h1.27 r90
  text "B9  C9" at 21.609,61.781 h1.27 r90
  text "D9  A10" at 24.149,61.781 h1.27 r90
  text "C10 D10" at 26.689,61.781 h1.27 r90
  text "E10 E11" at 29.229,61.781 h1.27 r90
  text "A11 B11" at 31.769,61.781 h1.27 r90
  text "C11 D11" at 34.309,61.781 h1.27 r90
  text "M11 G10" at 36.849,61.781 h1.27 r90
  text "K11 J11" at 39.389,61.781 h1.27 r90
  text "A12 B12" at 41.929,61.781 h1.27 r90
  text "A13 B13" at 44.469,61.781 h1.27 r90
  text "C12 C13" at 47.009,61.781 h1.27 r90
  text "D12 E12" at 49.549,61.781 h1.27 r90
  text "C7  A7" at 52.089,61.781 h1.27 r90
  text "GND GND" at 54.629,61.781 h1.27 r90
  text "TXM RXP" at 57.169,61.781 h1.27 r90
  text "RXM TXP" at 59.709,61.781 h1.27 r90
  text "GND GND" at 62.249,61.781 h1.27 r90
  text "SPD WAK" at 64.789,61.781 h1.27 r90
  text "GND GND" at 67.329,61.781 h1.27 r90
  text "GND GND" at 3.829,37.781 h1.27 r90
  text "3V3 3V3" at 6.369,37.781 h1.27 r90
  text "D7  E7" at 8.909,37.781 h1.27 r90
  text "E8  D8" at 11.449,37.781 h1.27 r90
  text "G14 F11" at 13.989,37.781 h1.27 r90
  text "C8  B8" at 16.529,37.781 h1.27 r90
  text "A8  A9" at 19.069,37.781 h1.27 r90
  text "B9  C9" at 21.609,37.781 h1.27 r90
  text "D9  A10" at 24.149,37.781 h1.27 r90
  text "C10 D10" at 26.689,37.781 h1.27 r90
  text "E10 E11" at 29.229,37.781 h1.27 r90
  text "A11 B11" at 31.769,37.781 h1.27 r90
  text "C11 D11" at 34.309,37.781 h1.27 r90
  text "M11 G10" at 36.849,37.781 h1.27 r90
  text "K11 J11" at 39.389,37.781 h1.27 r90
  text "A12 B12" at 41.929,37.781 h1.27 r90
  text "A13 B13" at 44.469,37.781 h1.27 r90
  text "C12 C13" at 47.009,37.781 h1.27 r90
  text "D12 E12" at 49.549,37.781 h1.27 r90
  text "C7  A7" at 52.089,37.781 h1.27 r90
  text "GND GND" at 54.629,37.781 h1.27 r90
  text "TXM RXP" at 57.169,37.781 h1.27 r90
  text "RXM TXP" at 59.709,37.781 h1.27 r90
  text "GND GND" at 62.249,37.781 h1.27 r90
  text "SPD WAK" at 64.789,37.781 h1.27 r90
  text "GND GND" at 67.329,37.781 h1.27 r90
  text "GND GND" at 3.829,13.781 h1.27 r90
  text "3V3 3V3" at 6.369,13.781 h1.27 r90
  text "D7  E7" at 8.909,13.781 h1.27 r90
  text "E8  D8" at 11.449,13.781 h1.27 r90
  text "G14 F11" at 13.989,13.781 h1.27 r90
  text "C8  B8" at 16.529,13.781 h1.27 r90
  text "A8  A9" at 19.069,13.781 h1.27 r90
  text "B9  C9" at 21.609,13.781 h1.27 r90
  text "D9  A10" at 24.149,13.781 h1.27 r90
  text "C10 D10" at 26.689,13.781 h1.27 r90
  text "E10 E11" at 29.229,13.781 h1.27 r90
  text "A11 B11" at 31.769,13.781 h1.27 r90
  text "C11 D11" at 34.309,13.781 h1.27 r90
  text "M11 G10" at 36.849,13.781 h1.27 r90
  text "K11 J11" at 39.389,13.781 h1.27 r90
  text "A12 B12" at 41.929,13.781 h1.27 r90
  text "A13 B13" at 44.469,13.781 h1.27 r90
  text "C12 C13" at 47.009,13.781 h1.27 r90
  text "D12 E12" at 49.549,13.781 h1.27 r90
  text "C7  A7" at 52.089,13.781 h1.27 r90
  text "GND GND" at 54.629,13.781 h1.27 r90
  text "TXM RXP" at 57.169,13.781 h1.27 r90
  text "RXM TXP" at 59.709,13.781 h1.27 r90
  text "GND GND" at 62.249,13.781 h1.27 r90
  text "SPD WAK" at 64.789,13.781 h1.27 r90
  text "GND GND" at 67.329,13.781 h1.27 r90
Bottom Overlay:
  lines w0.152: 1.289,13.527 1.289,22.925 11.449,22.925 11.449,13.527 1.289,13.527 ; 1.289,37.527 11.449,37.527 11.449,46.925 1.289,46.925 1.289,37.527 ; 1.289,61.527 11.449,61.527 11.449,70.925 1.289,70.925 1.289,61.527 ; 1.289,85.527 11.449,85.527 11.449,94.925 1.289,94.925 1.289,85.527 ; 31.769,13.527 31.769,22.925 34.309,22.925 34.309,13.527 31.769,13.527 ; 31.769,37.527 34.309,37.527 34.309,46.925 31.769,46.925 31.769,37.527 ; 31.769,61.527 34.309,61.527 34.309,70.925 31.769,70.925 31.769,61.527 ; 31.769,85.527 34.309,85.527 34.309,94.925 31.769,94.925 31.769,85.527 ; 49.549,13.527 49.549,18.798 52.089,18.798 52.089,13.527 49.549,13.527 ; 49.549,37.527 52.089,37.527 52.089,42.798 49.549,42.798 49.549,37.527 ; 49.549,61.527 52.089,61.527 52.089,66.798 49.549,66.798 49.549,61.527 ; 49.549,85.527 52.089,85.527 52.089,90.798 49.549,90.798 49.549,85.527 ; 59.709,13.527 59.709,22.925 62.249,22.925 62.249,18.798 64.789,18.798 64.789,22.925 67.329,22.925 67.329,13.527 59.709,13.527 ; 59.709,37.527 67.329,37.527 67.329,46.925 64.789,46.925 64.789,42.798 62.249,42.798 62.249,46.925 59.709,46.925 59.709,37.527 ; 59.709,61.527 67.329,61.527 67.329,70.925 64.789,70.925 64.789,66.798 62.249,66.798 62.249,70.925 59.709,70.925 59.709,61.527 ; 59.709,85.527 67.329,85.527 67.329,94.925 64.789,94.925 64.789,90.798 62.249,90.798 62.249,94.925 59.709,94.925 59.709,85.527
  text "GND GND" at 3.829,94.671 h1.27 r90
  text "5V  5V" at 6.369,94.671 h1.27 r90
  text "GND GND" at 8.909,94.671 h1.27 r90
  text "3V3 3V3" at 11.449,94.671 h1.27 r90
  text "L6  M6" at 13.989,94.671 h1.27 r90
  text "M7  K7" at 16.529,94.671 h1.27 r90
  text "L8  M8" at 19.069,94.671 h1.27 r90
  text "N7  P7" at 21.609,94.671 h1.27 r90
  text "L7  H10" at 24.149,94.671 h1.27 r90
  text "M12 L10" at 26.689,94.671 h1.27 r90
  text "M14 K10" at 29.229,94.671 h1.27 r90
  text "L12 L11" at 31.769,94.671 h1.27 r90
  text "GND GND" at 34.309,94.671 h1.27 r90
  text "K14 L14" at 36.849,94.671 h1.27 r90
  text "J12 K12" at 39.389,94.671 h1.27 r90
  text "H11 H12" at 41.929,94.671 h1.27 r90
  text "H13 G12" at 44.469,94.671 h1.27 r90
  text "L13 J13" at 47.009,94.671 h1.27 r90
  text "J14 M13" at 49.549,94.671 h1.27 r90
  text "G11" at 52.089,94.671 h1.27 r90
  text "G13 H14" at 54.629,94.671 h1.27 r90
  text "F14 F13" at 57.169,94.671 h1.27 r90
  text "E14 F12" at 59.709,94.671 h1.27 r90
  text "CD WDOG" at 62.249,94.671 h1.27 r90
  text "B14" at 64.789,94.671 h1.27 r90
  text "GND GND" at 67.329,94.671 h1.27 r90
  text "COIN" at 52.089,90.544 h1.27 r90
  text "Vsel" at 64.789,90.544 h1.27 r90
  text "GND GND" at 3.829,70.671 h1.27 r90
  text "5V  5V" at 6.369,70.671 h1.27 r90
  text "GND GND" at 8.909,70.671 h1.27 r90
  text "3V3 3V3" at 11.449,70.671 h1.27 r90
  text "L6  M6" at 13.989,70.671 h1.27 r90
  text "M7  K7" at 16.529,70.671 h1.27 r90
  text "L8  M8" at 19.069,70.671 h1.27 r90
  text "N7  P7" at 21.609,70.671 h1.27 r90
  text "L7  H10" at 24.149,70.671 h1.27 r90
  text "M12 L10" at 26.689,70.671 h1.27 r90
  text "M14 K10" at 29.229,70.671 h1.27 r90
  text "L12 L11" at 31.769,70.671 h1.27 r90
  text "GND GND" at 34.309,70.671 h1.27 r90
  text "K14 L14" at 36.849,70.671 h1.27 r90
  text "J12 K12" at 39.389,70.671 h1.27 r90
  text "H11 H12" at 41.929,70.671 h1.27 r90
  text "H13 G12" at 44.469,70.671 h1.27 r90
  text "L13 J13" at 47.009,70.671 h1.27 r90
  text "J14 M13" at 49.549,70.671 h1.27 r90
  text "G11" at 52.089,70.671 h1.27 r90
  text "G13 H14" at 54.629,70.671 h1.27 r90
  text "F14 F13" at 57.169,70.671 h1.27 r90
  text "E14 F12" at 59.709,70.671 h1.27 r90
  text "CD WDOG" at 62.249,70.671 h1.27 r90
  text "B14" at 64.789,70.671 h1.27 r90
  text "GND GND" at 67.329,70.671 h1.27 r90
  text "COIN" at 52.089,66.544 h1.27 r90
  text "Vsel" at 64.789,66.544 h1.27 r90
  text "GND GND" at 3.829,46.671 h1.27 r90
  text "5V  5V" at 6.369,46.671 h1.27 r90
  text "GND GND" at 8.909,46.671 h1.27 r90
  text "3V3 3V3" at 11.449,46.671 h1.27 r90
  text "L6  M6" at 13.989,46.671 h1.27 r90
  text "M7  K7" at 16.529,46.671 h1.27 r90
  text "L8  M8" at 19.069,46.671 h1.27 r90
  text "N7  P7" at 21.609,46.671 h1.27 r90
  text "L7  H10" at 24.149,46.671 h1.27 r90
  text "M12 L10" at 26.689,46.671 h1.27 r90
  text "M14 K10" at 29.229,46.671 h1.27 r90
  text "L12 L11" at 31.769,46.671 h1.27 r90
  text "GND GND" at 34.309,46.671 h1.27 r90
  text "K14 L14" at 36.849,46.671 h1.27 r90
  text "J12 K12" at 39.389,46.671 h1.27 r90
  text "H11 H12" at 41.929,46.671 h1.27 r90
  text "H13 G12" at 44.469,46.671 h1.27 r90
  text "L13 J13" at 47.009,46.671 h1.27 r90
  text "J14 M13" at 49.549,46.671 h1.27 r90
  text "G11" at 52.089,46.671 h1.27 r90
  text "G13 H14" at 54.629,46.671 h1.27 r90
  text "F14 F13" at 57.169,46.671 h1.27 r90
  text "E14 F12" at 59.709,46.671 h1.27 r90
  text "CD WDOG" at 62.249,46.671 h1.27 r90
  text "B14" at 64.789,46.671 h1.27 r90
  text "GND GND" at 67.329,46.671 h1.27 r90
  text "COIN" at 52.089,42.544 h1.27 r90
  text "Vsel" at 64.789,42.544 h1.27 r90
  text "GND GND" at 3.829,22.671 h1.27 r90
  text "5V  5V" at 6.369,22.671 h1.27 r90
  text "GND GND" at 8.909,22.671 h1.27 r90
  text "3V3 3V3" at 11.449,22.671 h1.27 r90
  text "L6  M6" at 13.989,22.671 h1.27 r90
  text "M7  K7" at 16.529,22.671 h1.27 r90
  text "L8  M8" at 19.069,22.671 h1.27 r90
  text "N7  P7" at 21.609,22.671 h1.27 r90
  text "L7  H10" at 24.149,22.671 h1.27 r90
  text "M12 L10" at 26.689,22.671 h1.27 r90
  text "M14 K10" at 29.229,22.671 h1.27 r90
  text "L12 L11" at 31.769,22.671 h1.27 r90
  text "GND GND" at 34.309,22.671 h1.27 r90
  text "K14 L14" at 36.849,22.671 h1.27 r90
  text "J12 K12" at 39.389,22.671 h1.27 r90
  text "H11 H12" at 41.929,22.671 h1.27 r90
  text "H13 G12" at 44.469,22.671 h1.27 r90
  text "L13 J13" at 47.009,22.671 h1.27 r90
  text "J14 M13" at 49.549,22.671 h1.27 r90
  text "G11" at 52.089,22.671 h1.27 r90
  text "G13 H14" at 54.629,22.671 h1.27 r90
  text "F14 F13" at 57.169,22.671 h1.27 r90
  text "E14 F12" at 59.709,22.671 h1.27 r90
  text "CD WDOG" at 62.249,22.671 h1.27 r90
  text "B14" at 64.789,22.671 h1.27 r90
  text "GND GND" at 67.329,22.671 h1.27 r90
  text "COIN" at 52.089,18.544 h1.27 r90
  text "Vsel" at 64.789,18.544 h1.27 r90